# EAGLE board MOSFET Astable Multivibrator (EAGLE 9.0.0)
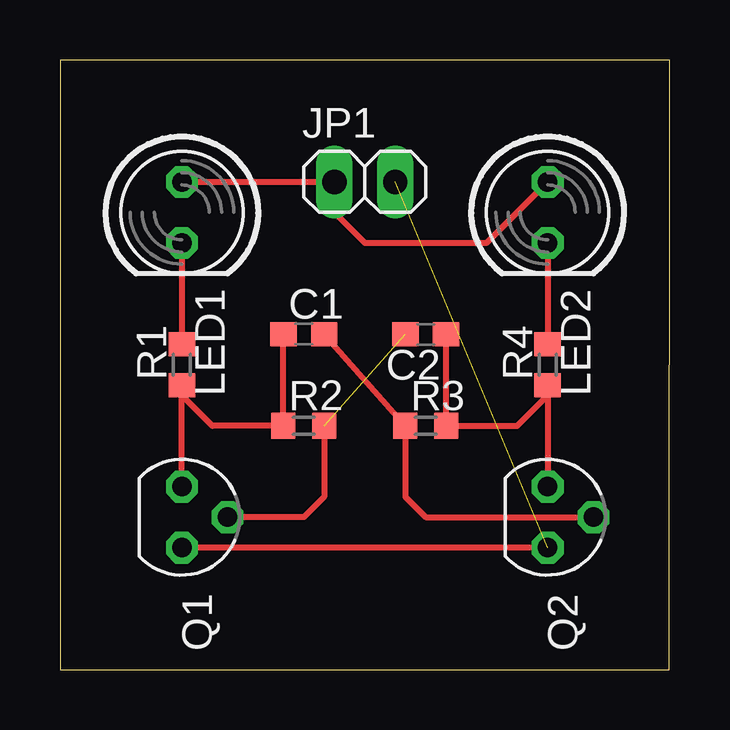
[diagram p0: board, top side]

Size 25.4 x 25.4 mm. Coordinates in mm from the lower left corner, seen from the top.
Outline: 0,0 25.38,0 25.4,25.4 0,25.4 0,0
Copper layers (1*16): Top 0.035mm / dielectric 1.5mm / Bottom 0.035mm
Design rules "default": minimum track width 6mil, minimum drill 0.35mm, track to track 6mil, track to pad 6mil, pad to pad 6mil, via to via 6mil, smd to smd 6mil, copper to edge 40mil, drill to drill 6mil, minimum pad ring 10mil, minimum via ring 8mil, stop-mask expansion 4mil, vias tented up to drill 0mil, thermal gap 10mil

## Footprints (pad centres in the part's own frame; a part is rotated, then mirrored left to right if it is on the bottom)
C0603 = smd 1.1 x 1: 1 -0.85,0; 2 0.85,0
1X02 = drill 1.016 long: 1 -1.27,0; 2 1.27,0
LED5MM = drill 0.813 octagon: A -1.27,0; K 1.27,0
SOT54E = drill 0.813 octagon: D -1.27,0; G 0,1.905; S 1.27,0
R0603 = smd 1 x 1.1: 1 -0.85,0; 2 0.85,0

## Placement (x,y rotation side)
C1  0.1uF  [C0603]  10.16,13.97 0 top
C2  0.1uF  [C0603]  15.24,13.97 180 top
JP1  [1X02]  12.7,20.32 0 top
LED1  [LED5MM]  5.08,19.05 270 top
LED2  [LED5MM]  20.32,19.05 270 top
Q1  BS170  [SOT54E]  5.08,6.35 270 top
Q2  BS170  [SOT54E]  20.32,6.35 270 top
R1  220  [R0603]  5.08,12.7 90 top
R2  2M  [R0603]  10.16,10.16 0 top
R3  2M  [R0603]  15.24,10.16 0 top
R4  220  [R0603]  20.32,12.7 90 top

## Library data of the parts
C1 C2 R1-R4 = resistor
JP1 = pinhead
LED1 LED2 = led
Q1 Q2 = transistor-small-signal

## Nets
N$1: JP1.1 LED1.A LED2.A
N$2: JP1.2 Q1.S Q2.S
N$3: C1.1 Q1.D R1.1 R2.1
N$4: C2.1 Q2.D R3.2 R4.1
N$5: LED2.K R4.2
N$6: LED1.K R1.2
N$9: C2.2 Q1.G R2.2
N$10: C1.2 Q2.G R3.1

## Tracks (layer width: path | path; a pad name or v marks a point on that pad's centre or on a via)
N$1
  Top 0.254: LED1.A JP1.1 11.43,19.05 12.7,17.78 17.78,17.78 LED2.A
N$2  (1 unrouted)
  Top 0.254: Q2.S Q1.S
N$3
  Top 0.254: Q1.D 5.08,11.43 | 5.08,11.43 R1.1 | C1.1 R2.1 6.35,10.16 5.08,11.43
N$4
  Top 0.254: C2.1 R3.2 19.05,10.16 20.32,11.43 | R4.1 20.32,11.43 | 20.32,11.43 Q2.D
N$5
  Top 0.254: LED2.K R4.2
N$6
  Top 0.254: LED1.K R1.2
N$9  (1 unrouted)
  Top 0.254: R2.2 11.01,7.2 10.16,6.35 Q1.G
N$10
  Top 0.254: 11.43,13.55 C1.2 R3.1 14.39,7.2 15.24,6.35 Q2.G